# EAGLE board control_panel_rev4 (EAGLE 5.06)
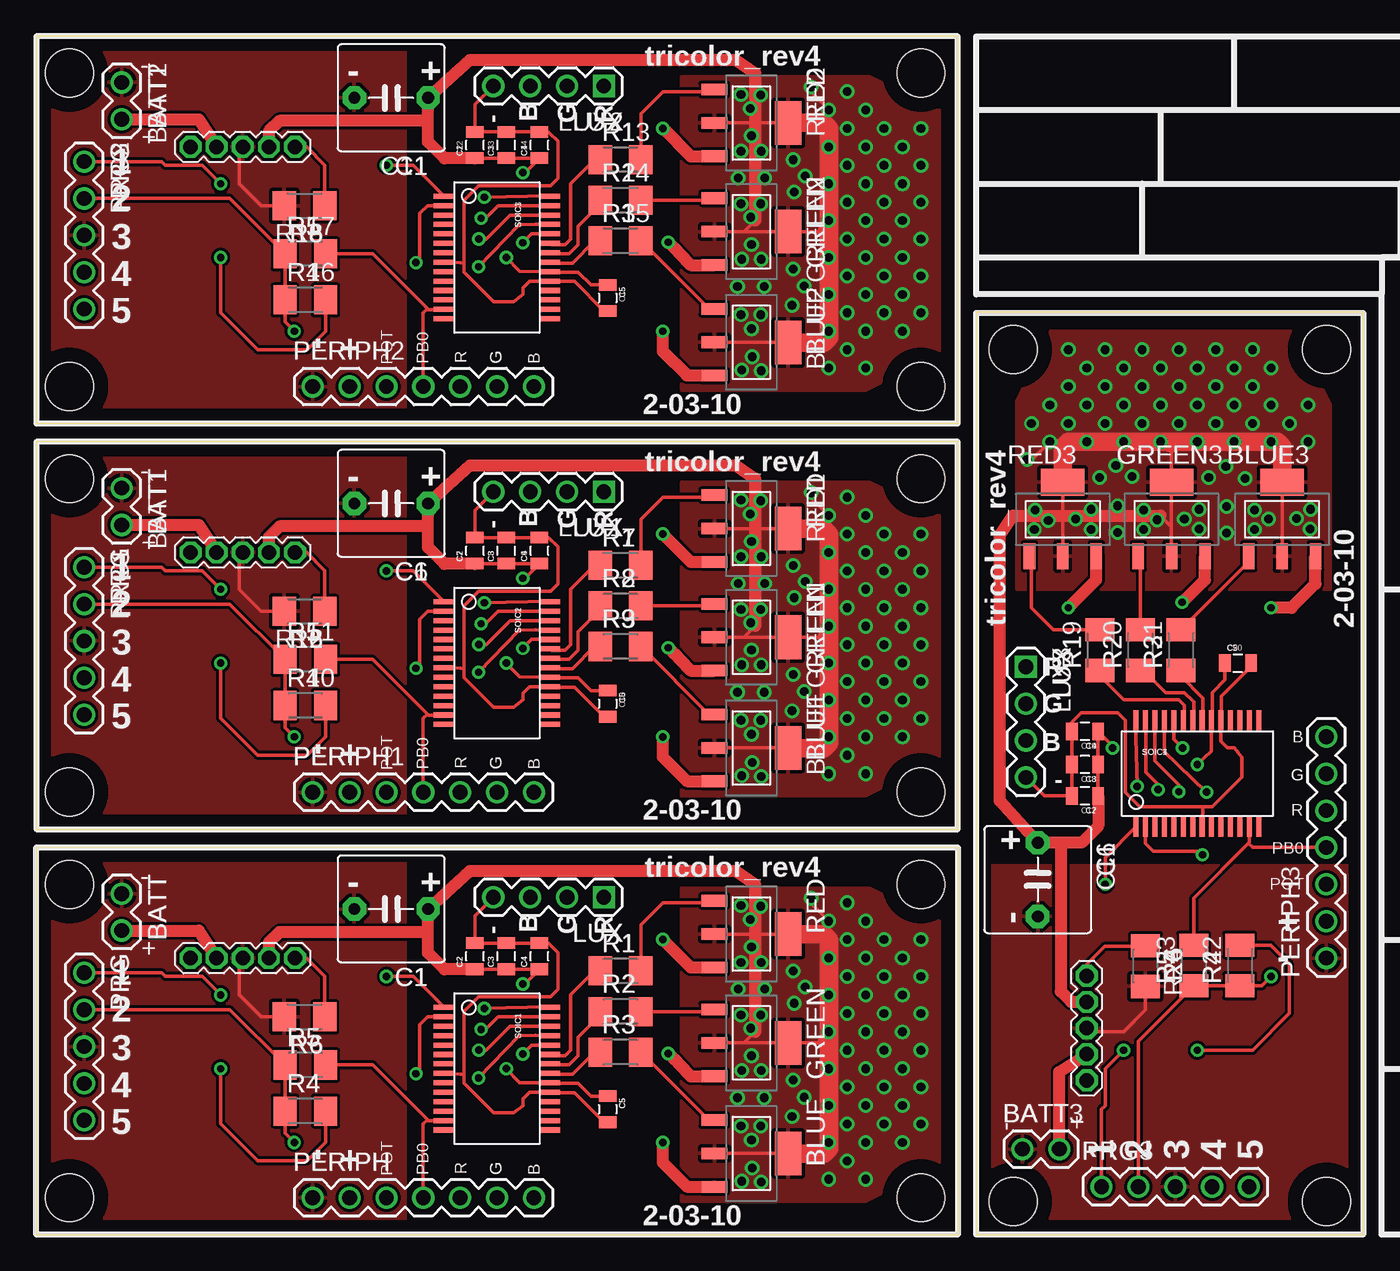
[diagram p0: board, top side]
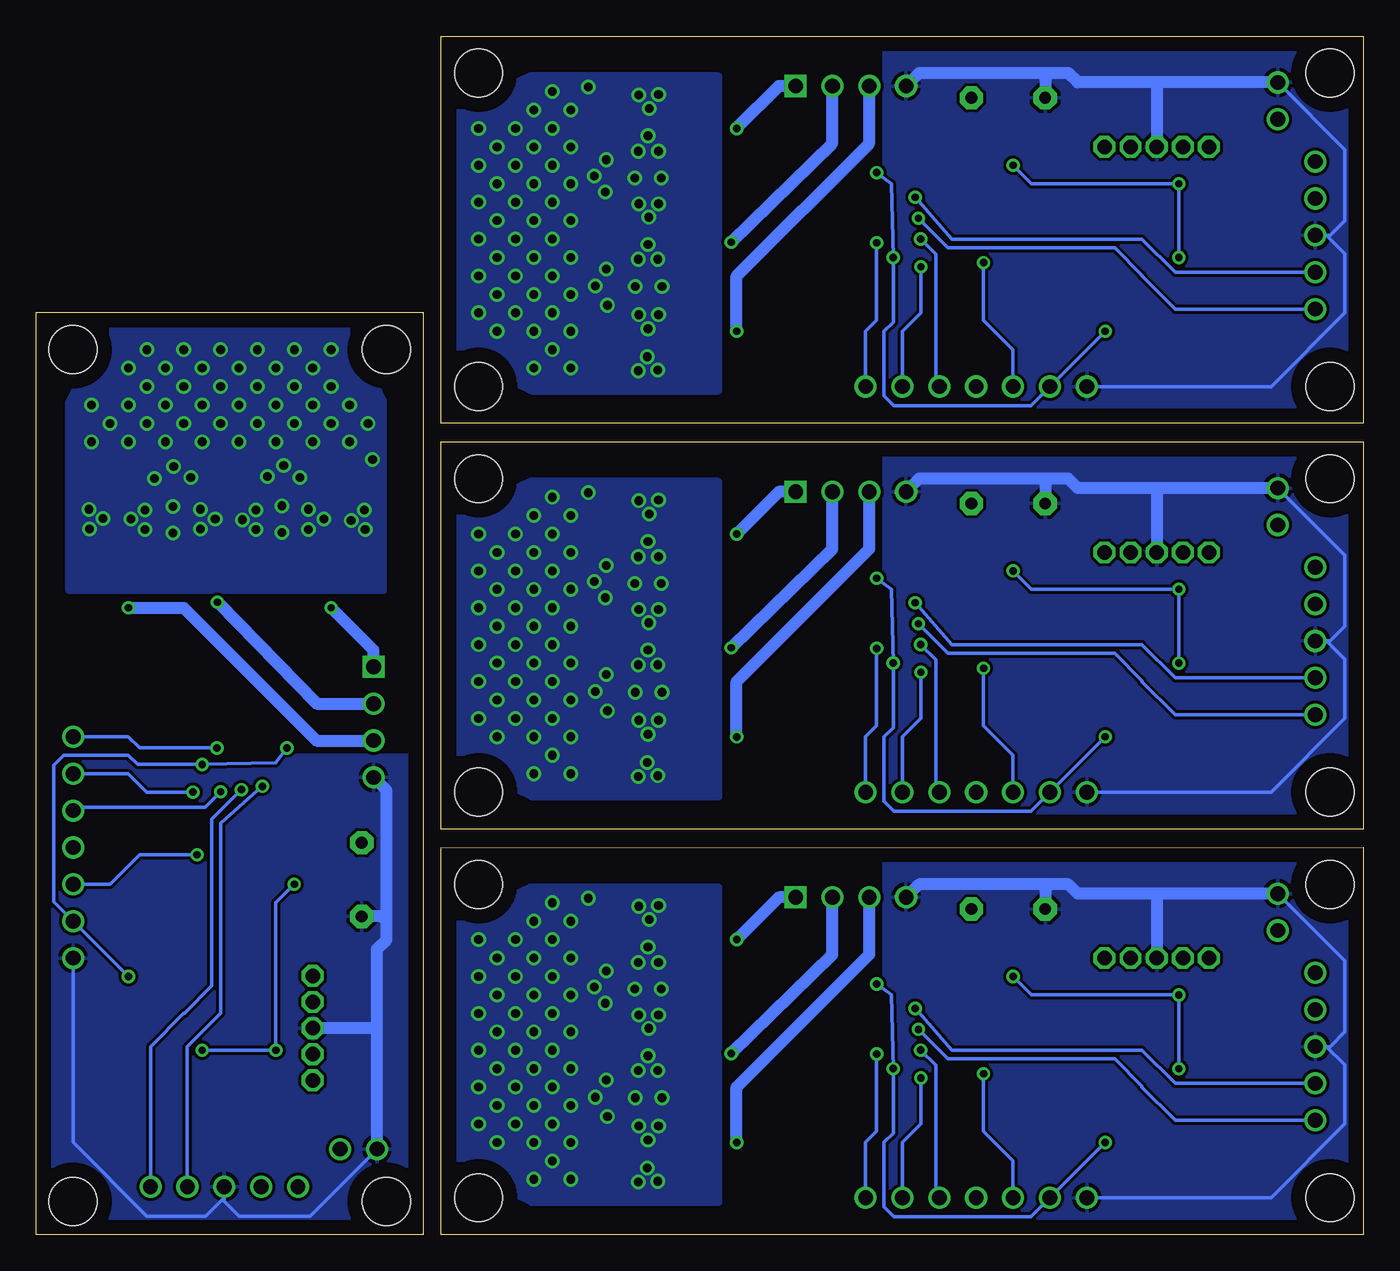
[diagram p1: board, bottom side, seen from below]

Size 91.44 x 82.55 mm. Coordinates in mm from the lower left corner, seen from the top.
Outline: 0,0 63.55,0 63.55,26.66 0,26.67 0,0
Outline: 0,27.94 63.55,27.94 63.55,54.6 0,54.61 0,27.94
Outline: 0,55.88 63.55,55.88 63.55,82.54 0,82.55 0,55.88
Outline: 91.44,0 91.44,63.55 64.78,63.55 64.77,0 91.44,0
Copper layers (1*16): Top 0.035mm / dielectric 1.5mm / Bottom 0.035mm
Design rules "default": minimum track width 10mil, minimum drill 24mil, track to track 8mil, track to pad 8mil, pad to pad 8mil, via to via 8mil, smd to smd 8mil, copper to edge 40mil, drill to drill 8mil, minimum pad ring 10mil, minimum via ring 8mil, stop-mask expansion 4mil, vias tented up to drill 0mil, thermal gap 10mil

## Footprints (pad centres in the part's own frame; a part is rotated, then mirrored left to right if it is on the bottom)
1X02 = drill 1.016 round: 1 0,0; 2 2.54,0
SOT223 = smd 0.8 x 1.8: BASE -2.3,-2.55; COLL 0,-2.54; EMIT 2.3,-2.55 | smd 3 x 1.85: HEAT 0,2.54
C5B7.2 = drill 0.813 pad 1.6 octagon: 1 -2.54,0; 2 2.54,0
0805 = smd 0.8 x 1.2: 1 -0.9,0; 2 0.9,0
1X04 = drill 1.016 square: 1 0,0 | drill 1.016 round: 2 2.54,0; 3 5.08,0; 4 7.62,0
HEADER2MM_5 = drill 1 octagon: P$6 0,0; P$7 1.8,0; P$8 3.6,0; P$9 5.4,0; P$10 7.2,0
1X07 = drill 1.016 round: 1 0,0; 2 2.54,0; 3 5.08,0; 4 7.62,0; 5 10.16,0; 6 12.7,0; 7 15.24,0
1X05 = drill 1.016 round: 1 0,0; 2 2.54,0; 3 5.08,0; 4 7.62,0; 5 10.16,0
M1206 = smd 1.6 x 2: 1 -1.4,0; 2 1.4,0
SSOP-28 = smd 0.348 x 1.397: 1 -4.225,-3.656; 2 -3.575,-3.656; 3 -2.925,-3.656; 4 -2.275,-3.656; 5 -1.625,-3.656; 6 -0.975,-3.656; 7 -0.325,-3.656; 8 0.325,-3.656; 9 0.975,-3.656; 10 1.625,-3.656; 11 2.275,-3.656; 12 2.925,-3.656; 13 3.575,-3.656; 14 4.225,-3.656; 15 4.225,3.656; 16 3.575,3.656; 17 2.925,3.656; 18 2.275,3.656; 19 1.625,3.656; 20 0.975,3.656; 21 0.325,3.656; 22 -0.325,3.656; 23 -0.975,3.656; 24 -1.625,3.656; 25 -2.275,3.656; 26 -2.925,3.656; 27 -3.575,3.656; 28 -4.225,3.656
STAND-OFF = hole 3.302: 0,0

## Placement (x,y rotation side)
BATT  [1X02]  5.89,23.49 270 top
BATT1  [1X02]  5.89,51.43 270 top
BATT2  [1X02]  5.89,79.37 270 top
BATT3  [1X02]  67.95,5.89 0 top
BLUE  FZTA14V1  [SOT223]  49.28,5.59 270 top
BLUE1  FZTA14V1  [SOT223]  49.28,33.53 270 top
BLUE2  FZTA14V1  [SOT223]  49.28,61.47 270 top
BLUE3  FZTA14V1  [SOT223]  85.85,49.28 0 top
C1  100uf  [C5B7.2]  24.46,22.43 180 top
C2  .01uF  [0805]  30.23,19.18 90 top
C3  .1uF  [0805]  32.38,19.18 90 top
C4  .1uF  [0805]  34.67,19.18 90 top
C5  .01uF  [0805]  39.37,8.64 270 top
C6  100uf  [C5B7.2]  24.46,50.37 180 top
C7  .01uF  [0805]  30.23,47.12 90 top
C8  .1uF  [0805]  32.38,47.12 90 top
C9  .1uF  [0805]  34.67,47.12 90 top
C10  .01uF  [0805]  39.37,36.58 270 top
C11  100uf  [C5B7.2]  24.46,78.31 180 top
C12  .01uF  [0805]  30.23,75.06 90 top
C13  .1uF  [0805]  32.38,75.06 90 top
C14  .1uF  [0805]  34.67,75.06 90 top
C15  .01uF  [0805]  39.37,64.52 270 top
C16  100uf  [C5B7.2]  69.01,24.46 270 top
C17  .01uF  [0805]  72.26,30.23 180 top
C18  .1uF  [0805]  72.26,32.39 180 top
C19  .1uF  [0805]  72.26,34.67 180 top
C20  .01uF  [0805]  82.8,39.37 0 top
GREEN  FZTA14V1  [SOT223]  49.28,13.21 270 top
GREEN1  FZTA14V1  [SOT223]  49.28,41.15 270 top
GREEN2  FZTA14V1  [SOT223]  49.28,69.09 270 top
GREEN3  FZTA14V1  [SOT223]  78.23,49.28 0 top
LUX  [1X04]  39.12,23.24 180 top
LUX1  [1X04]  39.12,51.18 180 top
LUX2  [1X04]  39.12,79.12 180 top
LUX3  [1X04]  68.2,39.12 270 top
OKR-T/3-W1  HEADER_2MM  [HEADER2MM_5]  17.83,46.99 180 top
OKR-T/3-W2  HEADER_2MM  [HEADER2MM_5]  17.83,74.93 180 top
OKR-T/3-W3  HEADER_2MM  [HEADER2MM_5]  72.39,17.83 270 top
OKR-T/3-W12  HEADER_2MM  [HEADER2MM_5]  17.83,19.05 180 top
PERIPH  [1X07]  19.05,2.54 0 top
PERIPH1  [1X07]  19.05,30.48 0 top
PERIPH2  [1X07]  19.05,58.42 0 top
PERIPH3  [1X07]  88.9,19.05 90 top
PRG  [1X05]  3.3,18.04 270 top
PRG1  [1X05]  3.3,45.97 270 top
PRG2  [1X05]  3.3,73.92 270 top
PRG3  [1X05]  73.41,3.3 0 top
R1  6.65K  [M1206]  40.26,18.16 0 top
R2  3.3K  [M1206]  40.26,15.37 0 top
R3  3.3K  [M1206]  40.26,12.57 0 top
R4  10K  [M1206]  18.54,8.51 0 top
R5  10K  [M1206]  18.54,11.68 0 top
R6  250  [M1206]  18.49,15 180 top
R7  6.65K  [M1206]  40.26,46.1 0 top
R8  3.3K  [M1206]  40.26,43.31 0 top
R9  3.3K  [M1206]  40.26,40.51 0 top
R10  10K  [M1206]  18.54,36.45 0 top
R11  10K  [M1206]  18.54,39.62 0 top
R12  250  [M1206]  18.49,42.94 180 top
R13  6.65K  [M1206]  40.26,74.04 0 top
R14  3.3K  [M1206]  40.26,71.25 0 top
R15  3.3K  [M1206]  40.26,68.45 0 top
R16  10K  [M1206]  18.54,64.39 0 top
R17  10K  [M1206]  18.54,67.56 0 top
R18  250  [M1206]  18.49,70.88 180 top
R19  6.65K  [M1206]  73.28,40.26 90 top
R20  3.3K  [M1206]  76.07,40.26 90 top
R21  3.3K  [M1206]  78.87,40.26 90 top
R22  10K  [M1206]  82.93,18.54 90 top
R23  10K  [M1206]  79.76,18.54 90 top
R24  250  [M1206]  76.44,18.5 270 top
RED  FZTA14V1  [SOT223]  49.28,20.7 270 top
RED1  FZTA14V1  [SOT223]  49.28,48.64 270 top
RED2  FZTA14V1  [SOT223]  49.28,76.58 270 top
RED3  FZTA14V1  [SOT223]  70.74,49.28 0 top
SOIC1  P18F2221SSOP  [SSOP-28]  31.75,11.43 270 top
SOIC2  P18F2221SSOP  [SSOP-28]  31.75,39.37 270 top
SOIC3  P18F2221SSOP  [SSOP-28]  31.75,67.31 270 top
SOIC4  P18F2221SSOP  [SSOP-28]  80.01,31.75 0 top
U$1  [STAND-OFF]  2.29,2.54 0 top
U$2  [STAND-OFF]  2.29,24.13 0 top
U$3  [STAND-OFF]  60.96,24.13 0 top
U$4  [STAND-OFF]  60.96,2.54 0 top
U$5  [STAND-OFF]  2.29,30.48 0 top
U$6  [STAND-OFF]  2.29,52.07 0 top
U$7  [STAND-OFF]  60.96,52.07 0 top
U$8  [STAND-OFF]  60.96,30.48 0 top
U$9  [STAND-OFF]  2.29,58.42 0 top
U$10  [STAND-OFF]  2.29,80.01 0 top
U$11  [STAND-OFF]  60.96,80.01 0 top
U$12  [STAND-OFF]  60.96,58.42 0 top
U$13  [STAND-OFF]  88.9,2.29 90 top
U$14  [STAND-OFF]  67.31,2.29 90 top
U$15  [STAND-OFF]  67.31,60.96 90 top
U$16  [STAND-OFF]  88.9,60.96 90 top

## Library data of the parts
BATT BATT1-BATT3 C2-C5 C7-C10 C12-C15 C17-C20 LUX LUX1-LUX3 PERIPH PERIPH1-PERIPH3 PRG PRG1-PRG3 U$1-U$16 = SparkFun
BLUE BLUE1-BLUE3 GREEN GREEN1-GREEN3 RED RED1-RED3 SOIC1-SOIC4 = purduecer
C1 C6 C11 C16 = capacitor-wima
OKR-T/3-W1-OKR-T/3-W3 OKR-T/3-W12 = NBitWonder
R1-R24 = resistor

## Nets
BLUE_IND: PERIPH.7 SOIC1.24
BLUE_IND1: PERIPH1.7 SOIC2.24
BLUE_IND2: PERIPH2.7 SOIC3.24
BLUE_IND3: PERIPH3.7 SOIC4.24
BLUE_LUX: BLUE.EMIT LUX.3
BLUE_LUX1: BLUE1.EMIT LUX1.3
BLUE_LUX2: BLUE2.EMIT LUX2.3
BLUE_LUX3: BLUE3.EMIT LUX3.3
GND: BATT.1 C1.2 C2.2 C3.2 C4.2 C5.2 LUX.4 OKR-T/3-W12.P$8 PERIPH.1 PRG.3 R6.2 SOIC1.8 SOIC1.19
GND1: BATT1.1 C6.2 C7.2 C8.2 C9.2 C10.2 LUX1.4 OKR-T/3-W1.P$8 PERIPH1.1 PRG1.3 R12.2 SOIC2.8 SOIC2.19
GND2: BATT2.1 C11.2 C12.2 C13.2 C14.2 C15.2 LUX2.4 OKR-T/3-W2.P$8 PERIPH2.1 PRG2.3 R18.2 SOIC3.8 SOIC3.19
GND3: BATT3.1 C16.2 C17.2 C18.2 C19.2 C20.2 LUX3.4 OKR-T/3-W3.P$8 PERIPH3.1 PRG3.3 R24.2 SOIC4.8 SOIC4.19
GREEN_IND: PERIPH.6 SOIC1.25
GREEN_IND1: PERIPH1.6 SOIC2.25
GREEN_IND2: PERIPH2.6 SOIC3.25
GREEN_IND3: PERIPH3.6 SOIC4.25
GREEN_LUX: GREEN.EMIT LUX.2
GREEN_LUX1: GREEN1.EMIT LUX1.2
GREEN_LUX2: GREEN2.EMIT LUX2.2
GREEN_LUX3: GREEN3.EMIT LUX3.2
MCLR: PRG.1 R4.2 SOIC1.1
MCLR1: PRG1.1 R10.2 SOIC2.1
MCLR2: PRG2.1 R16.2 SOIC3.1
MCLR3: PRG3.1 R22.2 SOIC4.1
N$1: R7.1 SOIC2.23
N$2: R7.2 RED1.BASE
N$3: R8.1 SOIC2.22
N$4: R1.1 SOIC1.23
N$5: R1.2 RED.BASE
N$6: R2.1 SOIC1.22
N$7: GREEN.BASE R2.2
N$8: R3.1 SOIC1.21
N$9: BLUE.BASE R3.2
N$10: GREEN1.BASE R8.2
N$11: R9.1 SOIC2.21
N$12: BLUE1.BASE R9.2
N$13: OKR-T/3-W1.P$6 R12.1
N$14: R13.1 SOIC3.23
N$15: R13.2 RED2.BASE
N$16: R14.1 SOIC3.22
N$17: GREEN2.BASE R14.2
N$18: R15.1 SOIC3.21
N$19: OKR-T/3-W12.P$6 R6.1
N$20: BLUE2.BASE R15.2
N$21: OKR-T/3-W2.P$6 R18.1
N$22: R19.1 SOIC4.23
N$23: R19.2 RED3.BASE
N$24: R20.1 SOIC4.22
N$25: GREEN3.BASE R20.2
N$26: R21.1 SOIC4.21
N$27: BLUE3.BASE R21.2
N$28: OKR-T/3-W3.P$6 R24.1
PB0: PERIPH.4 R5.2 SOIC1.13
PB1: PERIPH1.4 R11.2 SOIC2.13
PB2: PERIPH2.4 R17.2 SOIC3.13
PB3: PERIPH3.4 R23.2 SOIC4.13
PGC: PRG.5 SOIC1.27
PGC1: PRG1.5 SOIC2.27
PGC2: PRG2.5 SOIC3.27
PGC3: PRG3.5 SOIC4.27
PGD: PRG.4 SOIC1.28
PGD1: PRG1.4 SOIC2.28
PGD2: PRG2.4 SOIC3.28
PGD3: PRG3.4 SOIC4.28
POT: PERIPH.3 SOIC1.2
POT1: PERIPH1.3 SOIC2.2
POT2: PERIPH2.3 SOIC3.2
POT3: PERIPH3.3 SOIC4.2
PWR: BATT.2 OKR-T/3-W12.P$9
PWR1: BATT1.2 OKR-T/3-W1.P$9
PWR2: BATT2.2 OKR-T/3-W2.P$9
PWR3: BATT3.2 OKR-T/3-W3.P$9
RED_IND: PERIPH.5 SOIC1.26
RED_IND1: PERIPH1.5 SOIC2.26
RED_IND2: PERIPH2.5 SOIC3.26
RED_IND3: PERIPH3.5 SOIC4.26
RED_LUX: LUX.1 RED.EMIT
RED_LUX1: LUX1.1 RED1.EMIT
RED_LUX2: LUX2.1 RED2.EMIT
RED_LUX3: LUX3.1 RED3.EMIT
VCC: BLUE.COLL BLUE.HEAT C1.1 C2.1 C3.1 C4.1 C5.1 GREEN.COLL GREEN.HEAT OKR-T/3-W12.P$7 PERIPH.2 PRG.2 R4.1 R5.1 RED.COLL RED.HEAT SOIC1.20
VCC1: BLUE1.COLL BLUE1.HEAT C6.1 C7.1 C8.1 C9.1 C10.1 GREEN1.COLL GREEN1.HEAT OKR-T/3-W1.P$7 PERIPH1.2 PRG1.2 R10.1 R11.1 RED1.COLL RED1.HEAT SOIC2.20
VCC2: BLUE2.COLL BLUE2.HEAT C11.1 C12.1 C13.1 C14.1 C15.1 GREEN2.COLL GREEN2.HEAT OKR-T/3-W2.P$7 PERIPH2.2 PRG2.2 R16.1 R17.1 RED2.COLL RED2.HEAT SOIC3.20
VCC3: BLUE3.COLL BLUE3.HEAT C16.1 C17.1 C18.1 C19.1 C20.1 GREEN3.COLL GREEN3.HEAT OKR-T/3-W3.P$7 PERIPH3.2 PRG3.2 R22.1 R23.1 RED3.COLL RED3.HEAT SOIC4.20

## Tracks (layer width: path | path; a pad name or v marks a point on that pad's centre or on a via)
BLUE_IND  (via drill 0.51)
  Top 0.254: SOIC1.24 34.14,13.06 v33.53,12.45
  Bottom 0.254: v33.53,12.45 33.53,7.11 34.29,6.35 PERIPH.7
BLUE_IND1  (via drill 0.51)
  Top 0.254: SOIC2.24 34.14,41 v33.53,40.39
  Bottom 0.254: v33.53,40.39 33.53,35.05 34.29,34.29 PERIPH1.7
BLUE_IND2  (via drill 0.51)
  Top 0.254: SOIC3.24 34.14,68.94 v33.53,68.33
  Bottom 0.254: v33.53,68.33 33.53,62.99 34.29,62.23 PERIPH2.7
BLUE_IND3  (via drill 0.51)
  Top 0.254: SOIC4.24 78.39,34.14 v78.99,33.53
  Bottom 0.254: v78.99,33.53 84.33,33.53 85.09,34.29 PERIPH3.7
BLUE_LUX  (via drill 0.51)
  Top 0.813: v43.18,6.35 43.18,4.95 44.83,3.3 46.71,3.3 BLUE.EMIT
  Bottom 0.813: LUX.3 34.04,19.3 43.18,10.16 v43.18,6.35
BLUE_LUX1  (via drill 0.51)
  Top 0.813: v43.18,34.29 43.18,32.89 44.83,31.24 46.71,31.24 BLUE1.EMIT
  Bottom 0.813: LUX1.3 34.04,47.24 43.18,38.1 v43.18,34.29
BLUE_LUX2  (via drill 0.51)
  Top 0.813: v43.18,62.23 43.18,60.83 44.83,59.18 46.71,59.18 BLUE2.EMIT
  Bottom 0.813: LUX2.3 34.04,75.19 43.18,66.04 v43.18,62.23
BLUE_LUX3  (via drill 0.51)
  Top 0.813: v85.09,43.18 86.49,43.18 88.14,44.83 88.14,46.71 BLUE3.EMIT
  Bottom 0.813: LUX3.3 72.14,34.04 81.28,43.18 v85.09,43.18
GND
  Top 0.254: LUX.4 30.23,21.97 C2.2 C3.2 C4.2 34.68,20.07 35.31,20.07 35.94,19.43 35.94,16.89 35.43,16.38 31.11,16.38 31.11,16.39 30.47,16.39 29.46,15.38 29.46,12.7 | C5.2 39.13,7.74 37.08,9.78 35.43,9.78 SOIC1.19 33.98,9.81 33.53,9.36 33.53,8.89 32.89,8.38 31.5,8.38 29.46,10.41 29.46,11.05 | 29.46,11.05 29.25,11.06 SOIC1.8 | 29.46,12.7 29.46,11.05 | 29.46,12.7 29.46,12.96 | R6.2 15.48,15 13.97,16.51 13.97,18.91 OKR-T/3-W12.P$8
  Bottom 0.254: 2.54,12.96 2.29,12.96 1.27,13.97 1.27,18.87 BATT.1 | 2.54,12.96 PRG.3 | PERIPH.1 6.35,2.54 1.27,7.62 1.27,11.68 2.54,12.96
  Bottom 0.813: BATT.1 13.97,23.49 | 13.97,23.49 19.68,23.49 20.32,24.13 21.59,24.13 | 21.59,24.13 30.61,24.13 LUX.4 | C1.2 21.92,23.8 21.59,24.13 | OKR-T/3-W12.P$8 14.23,23.23 13.97,23.49
  pour Bottom: 33.02,0 33.02,26.67 0,26.67 0,0
  pour Top: 25.4,0 25.4,26.67 0,26.67 0,0
GND1
  Top 0.254: LUX1.4 30.23,49.91 C7.2 C8.2 C9.2 34.68,48.01 35.31,48.01 35.94,47.37 35.94,44.83 35.43,44.32 31.11,44.32 30.47,44.32 29.46,43.32 29.46,40.64 | C10.2 39.13,35.68 37.08,37.72 35.43,37.72 SOIC2.19 33.98,37.75 33.53,37.3 33.53,36.83 32.89,36.32 31.5,36.32 29.46,38.35 29.46,38.99 | 29.46,38.99 29.25,39 SOIC2.8 | 29.46,40.64 29.46,38.99 | 29.46,40.64 29.46,40.89 | R12.2 15.48,42.94 13.97,44.45 13.97,46.85 OKR-T/3-W1.P$8
  Bottom 0.254: 2.54,40.89 2.29,40.89 1.27,41.91 1.27,46.81 BATT1.1 | 2.54,40.89 PRG1.3 | PERIPH1.1 6.35,30.48 1.27,35.56 1.27,39.62 2.54,40.89
  Bottom 0.813: BATT1.1 13.97,51.43 | 13.97,51.43 19.68,51.43 20.32,52.07 21.59,52.07 | 21.59,52.07 30.61,52.07 LUX1.4 | C6.2 21.92,51.74 21.59,52.07 | OKR-T/3-W1.P$8 14.23,51.17 13.97,51.43
  pour Bottom: 33.02,27.94 33.02,54.61 0,54.61 0,27.94
  pour Top: 25.4,27.94 25.4,54.61 0,54.61 0,27.94
GND2
  Top 0.254: LUX2.4 30.23,77.85 C12.2 C13.2 C14.2 34.68,75.95 35.31,75.95 35.94,75.31 35.94,72.77 35.43,72.26 31.11,72.26 31.11,72.27 30.47,72.27 29.46,71.26 29.46,68.58 | C15.2 39.13,63.62 37.08,65.66 35.43,65.66 SOIC3.19 33.98,65.69 33.53,65.24 33.53,64.77 32.89,64.26 31.5,64.26 29.46,66.3 29.46,66.93 | 29.46,66.93 29.25,66.94 SOIC3.8 | 29.46,68.58 29.46,66.93 | 29.46,68.58 29.46,68.84 | R18.2 15.48,70.88 13.97,72.39 13.97,74.79 OKR-T/3-W2.P$8
  Bottom 0.254: 2.54,68.84 2.29,68.84 1.27,69.85 1.27,74.75 BATT2.1 | 2.54,68.84 PRG2.3 | PERIPH2.1 6.35,58.42 1.27,63.5 1.27,67.56 2.54,68.84
  Bottom 0.813: BATT2.1 13.97,79.37 | 13.97,79.37 19.68,79.37 20.32,80.01 21.59,80.01 | 21.59,80.01 30.61,80.01 LUX2.4 | C11.2 21.92,79.68 21.59,80.01 | OKR-T/3-W2.P$8 14.23,79.11 13.97,79.37
  pour Bottom: 33.02,55.88 33.02,82.55 0,82.55 0,55.88
  pour Top: 25.4,55.88 25.4,82.55 0,82.55 0,55.88
GND3
  Top 0.254: LUX3.4 69.47,30.23 C17.2 C18.2 C19.2 71.37,34.68 71.37,35.31 72.01,35.94 74.55,35.94 75.06,35.43 75.06,31.12 75.06,30.47 76.06,29.46 78.74,29.46 | C20.2 83.7,39.13 81.66,37.09 81.66,35.43 SOIC4.19 81.63,33.98 82.08,33.53 82.55,33.53 83.06,32.89 83.06,31.5 81.03,29.46 80.39,29.46 | 80.39,29.46 80.38,29.25 SOIC4.8 | 78.74,29.46 80.39,29.46 | 78.74,29.46 78.49,29.46 | R24.2 76.44,15.48 74.93,13.97 72.53,13.97 OKR-T/3-W3.P$8
  Bottom 0.254: 78.49,2.54 78.49,2.29 77.47,1.27 72.57,1.27 BATT3.1 | 78.49,2.54 PRG3.3 | PERIPH3.1 88.9,6.35 83.82,1.27 79.76,1.27 78.49,2.54
  Bottom 0.813: BATT3.1 67.95,13.97 | 67.95,13.97 67.95,19.68 67.31,20.32 67.31,21.59 | 67.31,21.59 67.31,30.61 LUX3.4 | C16.2 67.64,21.92 67.31,21.59 | OKR-T/3-W3.P$8 68.21,14.23 67.95,13.97
  pour Bottom: 91.44,33.02 64.77,33.02 64.77,0 91.44,0
  pour Top: 91.44,25.4 64.77,25.4 64.77,0 91.44,0
GREEN_IND  (via drill 0.51)
  Top 0.254: v30.48,10.8 33.26,13.7 34.42,13.72 SOIC1.25
  Bottom 0.254: v30.48,10.8 30.48,7.62 31.75,6.35 PERIPH.6
GREEN_IND1  (via drill 0.51)
  Top 0.254: v30.48,38.74 33.26,41.64 34.42,41.66 SOIC2.25
  Bottom 0.254: v30.48,38.74 30.48,35.56 31.75,34.29 PERIPH1.6
GREEN_IND2  (via drill 0.51)
  Top 0.254: v30.48,66.68 33.26,69.58 34.42,69.6 SOIC3.25
  Bottom 0.254: v30.48,66.68 30.48,63.5 31.75,62.23 PERIPH2.6
GREEN_IND3  (via drill 0.51)
  Top 0.254: v80.64,30.48 77.74,33.26 77.72,34.42 SOIC4.25
  Bottom 0.254: v80.64,30.48 83.82,30.48 85.09,31.75 PERIPH3.6
GREEN_LUX  (via drill 0.51)
  Top 0.813: v43.56,12.48 43.94,12.1 44.96,11.05 45.1,10.91 GREEN.EMIT
  Bottom 0.813: LUX.2 36.58,19.3 v43.56,12.48
GREEN_LUX1  (via drill 0.51)
  Top 0.813: v43.56,40.42 43.94,40.04 44.96,38.99 45.1,38.85 GREEN1.EMIT
  Bottom 0.813: LUX1.2 36.58,47.24 v43.56,40.42
GREEN_LUX2  (via drill 0.51)
  Top 0.813: v43.56,68.36 43.94,67.98 44.96,66.93 45.1,66.79 GREEN2.EMIT
  Bottom 0.813: LUX2.2 36.58,75.19 v43.56,68.36
GREEN_LUX3  (via drill 0.51)
  Top 0.813: v78.96,43.56 79.34,43.94 80.39,44.96 80.53,45.1 GREEN3.EMIT
  Bottom 0.813: LUX3.2 72.14,36.58 v78.96,43.56
MCLR  (via drill 0.5)
  Top 0.254: 28.08,15.66 27.94,15.66 27.95,15.66 SOIC1.1 25.97,17.78 v24.13,17.78 | PRG.1 8.64,18.04 8.89,17.78 11.43,17.78 v12.7,16.51 | v12.7,11.43 12.7,7.62 15.24,5.08 18.66,5.08 19.94,6.36 R4.2
  Bottom 0.254: v24.13,17.78 22.86,16.51 v12.7,16.51 v12.7,11.43
MCLR1  (via drill 0.5)
  Top 0.254: 28.08,43.6 27.94,43.6 27.95,43.6 SOIC2.1 25.97,45.72 v24.13,45.72 | PRG1.1 8.64,45.97 8.89,45.72 11.43,45.72 v12.7,44.45 | v12.7,39.37 12.7,35.56 15.24,33.02 18.66,33.02 19.94,34.3 R10.2
  Bottom 0.254: v24.13,45.72 22.86,44.45 v12.7,44.45 v12.7,39.37
MCLR2  (via drill 0.5)
  Top 0.254: 28.08,71.55 27.94,71.54 27.95,71.54 SOIC3.1 25.97,73.66 v24.13,73.66 | PRG2.1 8.64,73.92 8.89,73.66 11.43,73.66 v12.7,72.39 | v12.7,67.31 12.7,63.5 15.24,60.96 18.66,60.96 19.94,62.24 R16.2
  Bottom 0.254: v24.13,73.66 22.86,72.39 v12.7,72.39 v12.7,67.31
MCLR3  (via drill 0.5)
  Top 0.254: 75.78,28.08 75.78,27.94 75.78,27.95 SOIC4.1 73.66,25.97 v73.66,24.13 | PRG3.1 73.41,8.64 73.66,8.89 73.66,11.43 v74.93,12.7 | v80.01,12.7 83.82,12.7 86.36,15.24 86.36,18.66 85.08,19.94 R22.2
  Bottom 0.254: v73.66,24.13 74.93,22.86 v74.93,12.7 v80.01,12.7
N$1
  Top 0.254: R7.1 38.48,46.1 36.83,44.45 36.83,40.64 36.45,40.26 35.49,40.26 SOIC2.23
N$2
  Top 0.254: R7.2 41.66,49.28 43.18,50.8 46.59,50.8 RED1.BASE
N$3
  Top 0.254: R8.1 38.86,43.05 37.34,41.53 37.34,40.26 36.7,39.62 35.48,39.62 SOIC2.22
N$4
  Top 0.254: R1.1 38.48,18.16 36.83,16.51 36.83,12.7 36.45,12.32 35.49,12.32 SOIC1.23
N$5
  Top 0.254: R1.2 41.66,21.34 43.18,22.86 46.59,22.86 RED.BASE
N$6
  Top 0.254: R2.1 38.86,15.11 37.34,13.59 37.34,12.32 36.7,11.68 35.48,11.68 SOIC1.22
N$7
  Top 0.254: R2.2 46.59,15.37 GREEN.BASE
N$8
  Top 0.254: R3.1 38.48,12.57 36.96,11.05 35.46,11.05 SOIC1.21
N$9
  Top 0.254: BLUE.BASE 46.34,7.89 R3.2
N$10
  Top 0.254: R8.2 46.59,43.31 GREEN1.BASE
N$11
  Top 0.254: R9.1 38.48,40.51 36.96,38.99 35.46,38.99 SOIC2.21
N$12
  Top 0.254: BLUE1.BASE 46.34,35.83 R9.2
N$13
  Top 0.254: OKR-T/3-W1.P$6 18.62,46.99 19.88,45.73 19.88,42.96 R12.1
N$14
  Top 0.254: R13.1 38.48,74.04 36.83,72.39 36.83,68.58 36.45,68.2 35.49,68.2 SOIC3.23
N$15
  Top 0.254: R13.2 41.66,77.22 43.18,78.74 46.59,78.74 RED2.BASE
N$16
  Top 0.254: R14.1 38.86,70.99 37.34,69.47 37.34,68.2 36.7,67.56 35.48,67.56 SOIC3.22
N$17
  Top 0.254: R14.2 46.59,71.25 GREEN2.BASE
N$18
  Top 0.254: R15.1 38.48,68.45 36.96,66.93 35.46,66.93 SOIC3.21
N$19
  Top 0.254: OKR-T/3-W12.P$6 18.62,19.05 19.88,17.79 19.88,15.02 R6.1
N$20
  Top 0.254: BLUE2.BASE 46.34,63.77 R15.2
N$21
  Top 0.254: OKR-T/3-W2.P$6 18.62,74.93 19.88,73.67 19.88,70.9 R18.1
N$22
  Top 0.254: R19.1 73.28,38.48 74.93,36.83 78.74,36.83 79.12,36.45 79.12,35.49 SOIC4.23
N$23
  Top 0.254: R19.2 70.1,41.66 68.58,43.18 68.58,46.59 RED3.BASE
N$24
  Top 0.254: R20.1 76.33,38.86 77.85,37.34 79.12,37.34 79.76,36.7 79.76,35.48 SOIC4.22
N$25
  Top 0.254: R20.2 76.07,46.59 GREEN3.BASE
N$26
  Top 0.254: R21.1 78.87,38.48 80.39,36.96 80.39,35.46 SOIC4.21
N$27
  Top 0.254: BLUE3.BASE 83.55,46.34 R21.2
N$28
  Top 0.254: OKR-T/3-W3.P$6 72.39,18.62 73.65,19.88 76.42,19.88 R24.1
PB0
  Top 0.254: R5.2 23.18,11.68 26.95,7.91 | 26.95,7.91 27.03,7.83 28.07,7.83 SOIC1.13 | PERIPH.4 26.67,7.62 26.95,7.91
PB1
  Top 0.254: R11.2 23.18,39.62 26.95,35.85 | 26.95,35.85 27.03,35.77 28.07,35.77 SOIC2.13 | PERIPH1.4 26.67,35.56 26.95,35.85
PB2
  Top 0.254: R17.2 23.18,67.56 26.95,63.79 | 26.95,63.79 27.03,63.71 28.07,63.71 SOIC3.13 | PERIPH2.4 26.67,63.5 26.95,63.79
PB3
  Top 0.254: R23.2 79.76,23.18 83.53,26.96 | 83.53,26.96 83.61,27.03 83.61,28.07 SOIC4.13 | PERIPH3.4 83.82,26.67 83.53,26.96
PGC  (via drill 0.5)
  Top 0.254: v30.66,14.14 30.98,14.14 31.83,14.99 35.39,14.99 SOIC1.27
  Bottom 0.254: PRG.5 12.95,7.88 15.24,10.16 15.24,10.21 17.13,12.1 28.62,12.1 v30.66,14.14
PGC1  (via drill 0.5)
  Top 0.254: v30.66,42.08 30.98,42.08 31.83,42.93 35.39,42.93 SOIC2.27
  Bottom 0.254: PRG1.5 12.95,35.81 15.24,38.1 15.24,38.15 17.13,40.04 28.62,40.04 v30.66,42.08
PGC2  (via drill 0.5)
  Top 0.254: v30.66,70.02 30.98,70.02 31.83,70.87 35.39,70.87 SOIC3.27
  Bottom 0.254: PRG2.5 12.95,63.75 15.24,66.04 15.24,66.09 17.13,67.98 28.62,67.98 v30.66,70.02
PGC3  (via drill 0.5)
  Top 0.254: v77.31,30.66 77.31,30.98 76.45,31.84 76.45,35.39 SOIC4.27
  Bottom 0.254: PRG3.5 83.57,12.96 81.28,15.24 81.23,15.24 79.34,17.13 79.34,28.62 v77.31,30.66
PGD  (via drill 0.5)
  Top 0.254: v30.87,15.58 35.37,15.69 SOIC1.28
  Bottom 0.254: PRG.4 12.95,10.41 15.24,12.7 28.33,12.7 v30.87,15.58
PGD1  (via drill 0.5)
  Top 0.254: v30.87,43.52 35.37,43.63 SOIC2.28
  Bottom 0.254: PRG1.4 12.95,38.35 15.24,40.64 28.33,40.64 v30.87,43.52
PGD2  (via drill 0.5)
  Top 0.254: v30.87,71.46 35.37,71.57 SOIC3.28
  Bottom 0.254: PRG2.4 12.95,66.3 15.24,68.58 28.33,68.58 v30.87,71.46
PGD3  (via drill 0.5)
  Top 0.254: v75.86,30.88 75.75,35.37 SOIC4.28
  Bottom 0.254: PRG3.4 81.03,12.96 78.74,15.24 78.74,28.33 v75.86,30.88
POT  (via drill 0.5)
  Top 0.254: SOIC1.2 26.95,15.01 26.41,14.46 26.41,11.33 v26.16,11.08
  Bottom 0.254: v26.16,11.08 26.16,7.12 24.13,5.08 PERIPH.3
POT1  (via drill 0.5)
  Top 0.254: SOIC2.2 26.95,42.95 26.41,42.41 26.41,39.27 v26.16,39.02
  Bottom 0.254: v26.16,39.02 26.16,35.05 24.13,33.02 PERIPH1.3
POT2  (via drill 0.5)
  Top 0.254: SOIC3.2 26.95,70.89 26.41,70.34 26.41,67.21 v26.16,66.96
  Bottom 0.254: v26.16,66.96 26.16,62.99 24.13,60.96 PERIPH2.3
POT3  (via drill 0.5)
  Top 0.254: SOIC4.2 76.44,26.95 76.97,26.41 80.11,26.41 v80.36,26.16
  Bottom 0.254: v80.36,26.16 84.33,26.16 86.36,24.13 PERIPH3.3
PWR
  Top 0.813: BATT.2 11.2,20.95 OKR-T/3-W12.P$9
PWR1
  Top 0.813: BATT1.2 11.2,48.89 OKR-T/3-W1.P$9
PWR2
  Top 0.813: BATT2.2 11.2,76.83 OKR-T/3-W2.P$9
PWR3
  Top 0.813: BATT3.2 70.5,11.2 OKR-T/3-W3.P$9
RED_IND  (via drill 0.51)
  Top 0.254: SOIC1.26 32.66,14.36 30.99,12.69 30.52,12.69 v30.5,12.71
  Bottom 0.254: v30.5,12.71 | v30.5,12.71 29.45,11.65 29.45,2.78 PERIPH.5
RED_IND1  (via drill 0.51)
  Top 0.254: SOIC2.26 32.66,42.3 30.99,40.63 30.52,40.63 v30.5,40.65
  Bottom 0.254: v30.5,40.65 29.45,39.59 29.45,30.72 PERIPH1.5
RED_IND2  (via drill 0.51)
  Top 0.254: SOIC3.26 32.66,70.24 30.99,68.57 30.52,68.57 v30.5,68.59
  Bottom 0.254: v30.5,68.59 29.45,67.53 29.45,58.66 PERIPH2.5
RED_IND3  (via drill 0.51)
  Top 0.254: SOIC4.26 77.08,32.66 78.75,31 78.75,30.52 v78.73,30.51
  Bottom 0.254: v78.73,30.51 | v78.73,30.51 79.79,29.45 88.66,29.45 PERIPH3.5
RED_LUX  (via drill 0.51)
  Top 0.813: RED.EMIT 45.1,18.4 v43.18,20.32
  Bottom 0.813: v43.18,20.32 40.27,23.23 39.13,23.23 LUX.1
RED_LUX1  (via drill 0.51)
  Top 0.813: RED1.EMIT 45.1,46.34 v43.18,48.26
  Bottom 0.813: v43.18,48.26 40.27,51.17 39.13,51.17 LUX1.1
RED_LUX2  (via drill 0.51)
  Top 0.813: RED2.EMIT 45.1,74.28 v43.18,76.2
  Bottom 0.813: v43.18,76.2 40.27,79.11 39.13,79.11 LUX2.1
RED_LUX3  (via drill 0.51)
  Top 0.813: RED3.EMIT 73.04,45.1 v71.12,43.18
  Bottom 0.813: v71.12,43.18 68.21,40.27 LUX3.1
VCC  (via drill 0.5, 0.51, 0.6)
  Top 0.254: GREEN.COLL GREEN.HEAT | BLUE.HEAT BLUE.COLL | C5.1 38.22,9.54 37.34,10.41 35.45,10.41 SOIC1.20 33.3,10.47 v32.38,11.43 | RED.HEAT RED.COLL | GREEN.COLL 54.5,13.21 | PRG.2 13.33,15.49 R5.1 R4.1 17.14,6.99 v17.78,6.35 | C2.1 C3.1 C4.1 33.67,17.27 v33.53,17.27 | GREEN.COLL 48.77,13.21 49.53,13.97 | v53.4,23.17 53.4,22.8 v54.61,21.59
  Top 0.813: 49.53,13.97 49.53,24.13 48.17,25.05 29.88,25.05 C1.1 27,20.82 | 27,20.82 27,19.4 28.13,18.27 30.21,18.27 C2.1 | OKR-T/3-W12.P$7 16.03,20.11 16.76,20.84 26.98,20.84 27,20.82
  Top 1.27: RED.HEAT 54.23,20.7 54.61,20.32 v54.61,19.05 v54.61,16.51 v54.61,13.97 54.61,13.32 | 54.61,13.32 v54.61,11.43 v54.61,8.89 v54.61,6.35 54.61,5.91 54.27,5.57 51.83,5.57 BLUE.HEAT | 54.5,13.21 54.61,13.32
  Bottom 0.254: v33.53,17.27 32.51,16.51 v32.38,11.43 32.38,6.99 33.02,6.35 33.02,1.9 32.33,1.22 22.91,1.22 PERIPH.2 v17.78,6.35
  other vias: 54.61,3.81 57.15,3.81 55.88,5.08 57.15,6.35 55.88,7.62 59.69,6.35 58.42,7.62 60.96,7.62 59.69,8.89 57.15,8.89 55.88,10.16 58.42,10.16 60.96,10.16 59.69,11.43 57.15,11.43 55.88,12.7 58.42,12.7 60.96,12.7 59.69,13.97 57.15,13.97 55.88,15.24 58.42,15.24 60.96,15.24 59.69,16.51 57.15,16.51 55.88,17.78 60.96,17.78 58.42,17.78 57.15,19.05 55.88,20.32 59.69,19.05 58.42,20.32 60.96,20.32 57.15,21.59 55.88,22.86 48.61,3.67 49.96,3.63 49.33,4.59 49.29,6.53 48.56,7.49 49.91,7.49 52.08,8.14 52.92,9.46 52.15,10.65 50.15,9.42 48.32,9.42 49.96,11.31 48.61,11.31 49.29,12.32 49.24,14.21 48.56,15.13 49.91,15.13 50.2,16.92 48.37,16.92 52.22,15.93 52.98,17.05 52.15,18.16 49.96,18.75 48.56,18.75 49.29,19.82 49.19,21.7 48.56,22.67 49.91,22.62
  pour Top: 44.45,2.29 44.45,23.88 57.41,23.88 62.23,21.57 62.23,4.83 57.15,2.29
  pour Bottom: 44.45,23.88 57.4,23.88 62.23,21.59 62.23,4.7 57.28,2.29 44.45,2.29
VCC1  (via drill 0.5, 0.51, 0.6)
  Top 0.254: GREEN1.COLL GREEN1.HEAT | BLUE1.HEAT BLUE1.COLL | C10.1 38.22,37.48 37.34,38.35 35.45,38.35 SOIC2.20 33.3,38.41 v32.38,39.37 | RED1.HEAT RED1.COLL | GREEN1.COLL 54.5,41.15 | PRG1.2 13.33,43.43 R11.1 R10.1 17.14,34.93 v17.78,34.29 | C7.1 C8.1 C9.1 33.67,45.21 v33.53,45.21 | GREEN1.COLL 48.77,41.15 49.53,41.91 | v53.4,51.11 53.4,50.74 v54.61,49.53
  Top 0.813: 49.53,41.91 49.53,52.07 48.17,52.99 29.88,52.99 C6.1 27,48.76 | 27,48.76 27,47.34 28.13,46.21 30.21,46.21 C7.1 | OKR-T/3-W1.P$7 16.03,48.05 16.76,48.78 26.98,48.78 27,48.76
  Top 1.27: RED1.HEAT 54.23,48.64 54.61,48.26 v54.61,46.99 v54.61,44.45 v54.61,41.91 54.61,41.26 | 54.61,41.26 v54.61,39.37 v54.61,36.83 v54.61,34.29 54.61,33.85 54.27,33.51 51.83,33.51 BLUE1.HEAT | 54.5,41.15 54.61,41.26
  Bottom 0.254: v33.53,45.21 32.51,44.45 v32.38,39.37 32.38,34.93 33.02,34.29 33.02,29.85 32.33,29.16 22.91,29.16 PERIPH1.2 v17.78,34.29
  other vias: 54.61,31.75 57.15,31.75 55.88,33.02 57.15,34.29 55.88,35.56 59.69,34.29 58.42,35.56 60.96,35.56 59.69,36.83 57.15,36.83 55.88,38.1 58.42,38.1 60.96,38.1 59.69,39.37 57.15,39.37 55.88,40.64 58.42,40.64 60.96,40.64 59.69,41.91 57.15,41.91 55.88,43.18 58.42,43.18 60.96,43.18 59.69,44.45 57.15,44.45 55.88,45.72 60.96,45.72 58.42,45.72 57.15,46.99 55.88,48.26 59.69,46.99 58.42,48.26 60.96,48.26 57.15,49.53 55.88,50.8 48.61,31.61 49.96,31.57 49.33,32.53 49.29,34.47 48.56,35.43 49.91,35.43 52.08,36.08 52.92,37.4 52.15,38.59 50.15,37.36 48.32,37.36 49.96,39.25 48.61,39.25 49.29,40.27 49.24,42.15 48.56,43.07 49.91,43.07 50.2,44.86 48.37,44.86 52.22,43.88 52.98,44.99 52.15,46.1 49.96,46.69 48.56,46.69 49.29,47.76 49.19,49.64 48.56,50.61 49.91,50.56
  pour Top: 44.45,30.23 44.45,51.82 57.41,51.82 62.23,49.51 62.23,32.77 57.15,30.23
  pour Bottom: 44.45,51.82 57.4,51.82 62.23,49.53 62.23,32.64 57.28,30.23 44.45,30.23
VCC2  (via drill 0.5, 0.51, 0.6)
  Top 0.254: GREEN2.COLL GREEN2.HEAT | BLUE2.HEAT BLUE2.COLL | C15.1 38.22,65.42 37.34,66.3 35.45,66.3 SOIC3.20 33.3,66.35 v32.38,67.31 | RED2.HEAT RED2.COLL | GREEN2.COLL 54.5,69.09 | PRG2.2 13.33,71.38 R17.1 R16.1 17.14,62.87 v17.78,62.23 | C12.1 C13.1 C14.1 33.67,73.15 v33.53,73.15 | GREEN2.COLL 48.77,69.09 49.53,69.85 | v53.4,79.05 53.4,78.68 v54.61,77.47
  Top 0.813: 49.53,69.85 49.53,80.01 48.17,80.93 29.88,80.93 C11.1 27,76.7 | 27,76.7 27,75.28 28.13,74.15 30.21,74.15 C12.1 | OKR-T/3-W2.P$7 16.03,75.99 16.76,76.72 26.98,76.72 27,76.7
  Top 1.27: RED2.HEAT 54.23,76.58 54.61,76.2 v54.61,74.93 v54.61,72.39 v54.61,69.85 54.61,69.2 | 54.61,69.2 v54.61,67.31 v54.61,64.77 v54.61,62.23 54.61,61.79 54.27,61.45 51.83,61.45 BLUE2.HEAT | 54.5,69.09 54.61,69.2
  Bottom 0.254: v33.53,73.15 32.51,72.39 v32.38,67.31 32.38,62.87 33.02,62.23 33.02,57.78 32.33,57.1 22.91,57.1 PERIPH2.2 v17.78,62.23
  other vias: 54.61,59.69 57.15,59.69 55.88,60.96 57.15,62.23 55.88,63.5 59.69,62.23 58.42,63.5 60.96,63.5 59.69,64.77 57.15,64.77 55.88,66.04 58.42,66.04 60.96,66.04 59.69,67.31 57.15,67.31 55.88,68.58 58.42,68.58 60.96,68.58 59.69,69.85 57.15,69.85 55.88,71.12 58.42,71.12 60.96,71.12 59.69,72.39 57.15,72.39 55.88,73.66 60.96,73.66 58.42,73.66 57.15,74.93 55.88,76.2 59.69,74.93 58.42,76.2 60.96,76.2 57.15,77.47 55.88,78.74 48.61,59.55 49.96,59.51 49.33,60.47 49.29,62.41 48.56,63.37 49.91,63.37 52.08,64.02 52.92,65.34 52.15,66.53 50.15,65.31 48.32,65.31 49.96,67.19 48.61,67.19 49.29,68.2 49.24,70.09 48.56,71.01 49.91,71.01 50.2,72.8 48.37,72.8 52.22,71.81 52.98,72.93 52.15,74.04 49.96,74.63 48.56,74.63 49.29,75.7 49.19,77.58 48.56,78.55 49.91,78.5
  pour Top: 44.45,58.17 44.45,79.76 57.41,79.76 62.23,77.45 62.23,60.71 57.15,58.17
  pour Bottom: 44.45,79.76 57.4,79.76 62.23,77.47 62.23,60.58 57.28,58.17 44.45,58.17
VCC3  (via drill 0.5, 0.51, 0.6)
  Top 0.254: GREEN3.COLL GREEN3.HEAT | BLUE3.HEAT BLUE3.COLL | C20.1 81.9,38.22 81.03,37.34 81.03,35.45 SOIC4.20 80.97,33.3 v80.01,32.39 | RED3.HEAT RED3.COLL | GREEN3.COLL 78.23,54.5 | PRG3.2 75.95,13.33 R23.1 R22.1 84.45,17.14 v85.09,17.78 | C17.1 C18.1 C19.1 74.17,33.67 v74.17,33.53 | GREEN3.COLL 78.23,48.77 77.47,49.53 | v68.27,53.4 68.64,53.4 v69.85,54.61
  Top 0.813: 77.47,49.53 67.31,49.53 66.39,48.18 66.39,29.89 C16.1 70.62,27 | 70.62,27 72.04,27 73.17,28.13 73.17,30.21 C17.1 | OKR-T/3-W3.P$7 71.33,16.03 70.6,16.76 70.6,26.98 70.62,27
  Top 1.27: RED3.HEAT 70.74,54.23 71.12,54.61 v72.39,54.61 v74.93,54.61 v77.47,54.61 78.12,54.61 | 78.12,54.61 v80.01,54.61 v82.55,54.61 v85.09,54.61 85.53,54.61 85.87,54.27 85.87,51.84 BLUE3.HEAT | 78.23,54.5 78.12,54.61
  Bottom 0.254: v74.17,33.53 74.93,32.51 v80.01,32.39 84.45,32.39 85.09,33.02 89.54,33.02 90.22,32.33 90.22,22.92 PERIPH3.2 v85.09,17.78
  other vias: 87.63,54.61 87.63,57.15 86.36,55.88 85.09,57.15 83.82,55.88 85.09,59.69 83.82,58.42 83.82,60.96 82.55,59.69 82.55,57.15 81.28,55.88 81.28,58.42 81.28,60.96 80.01,59.69 80.01,57.15 78.74,55.88 78.74,58.42 78.74,60.96 77.47,59.69 77.47,57.15 76.2,55.88 76.2,58.42 76.2,60.96 74.93,59.69 74.93,57.15 73.66,55.88 73.66,60.96 73.66,58.42 72.39,57.15 71.12,55.88 72.39,59.69 71.12,58.42 71.12,60.96 69.85,57.15 68.58,55.88 87.77,48.61 87.82,49.96 86.85,49.34 84.92,49.29 83.95,48.56 83.95,49.91 83.3,52.08 81.98,52.92 80.79,52.15 82.02,50.16 82.02,48.32 80.13,49.96 80.13,48.61 79.12,49.29 77.23,49.24 76.31,48.56 76.31,49.91 74.52,50.2 74.52,48.37 75.51,52.22 74.39,52.99 73.28,52.15 72.69,49.96 72.69,48.56 71.62,49.29 69.74,49.19 68.77,48.56 68.82,49.91
  pour Top: 89.15,44.45 67.56,44.45 67.56,57.42 69.87,62.23 86.61,62.23 89.15,57.15
  pour Bottom: 67.56,44.45 67.56,57.41 69.85,62.23 86.74,62.23 89.15,57.28 89.15,44.45

## Text on the board
Pads: Resistor | Transistor | LED | Diode | Microcontroller | Wire | AVR | Inductor | Capacitor | Fuse | Header | Keypad | IC | Transformer | LCD | Potentiometer | Regulator | MOSFET | Vacuum Tube | Speaker | Amplifier | PIC | Antenna | Motor | Switch | Filter | Battery
tPlace: tricolor_rev4 | - | - | + | - | B | G | R | + | 1 | 2 | 3 | 4 | 5 | - | + | POT | PB0 | R | G | G | B | 2-03-10 | tricolor_rev4 | - | - | + | - | B | G | R | + | 1 | 2 | tricolor_rev4 | 2-03-10 | 3 | R | 4 | G | 5 | B | B | - | + | POT | PB0 | R | G | G | B | - | G | G | R | 2-03-10 | PB0 | + | tricolor_rev4 | POT | - | - | + | - | B | G | R | - | + | + | - | 1 | 2 | 3 | 4 | 5 | - | + | - | + | 1 | 2 | 3 | 4 | 5 | POT | PB0 | R | G | G | B | 2-03-10
_tNames: BATT | BATT | RED | RED | LUX | LUX | PRG | PRG | R1 | R1 | C1 | C1 | C2 | C2 | C3 | C3 | C4 | C4 | R2 | R2 | GREEN | GREEN | SOIC1 | SOIC1 | R6 | R6 | R3 | R3 | R5 | R5 | R4 | R4 | C5 | C5 | BLUE | BLUE | PERIPH | PERIPH | BATT | BATT | RED | RED | GREEN | GREEN | BLUE | BLUE | RED | RED | LUX | LUX | PRG | PRG | R1 | R1 | C1 | C1 | C2 | C2 | C3 | C3 | C4 | C4 | R2 | R2 | GREEN | GREEN | SOIC1 | SOIC1 | R6 | R6 | R3 | R3 | R5 | R5 | LUX | LUX | C5 | C5 | R1 | R1 | R2 | R2 | R3 | R3 | R4 | R4 | C5 | C5 | BLUE | BLUE | C4 | C4 | SOIC1 | SOIC1 | PERIPH | PERIPH | C3 | C3 | C2 | C2 | C1 | C1 | BATT | BATT | RED | RED | LUX | LUX | R6 | R6 | PRG | PRG | R1 | R1 | C1 | C1 | C2 | C2 | C3 | C3 | C4 | C4 | PERIPH | PERIPH | R2 | R2 | GREEN | GREEN | R5 | R5 | R4 | R4 | SOIC1 | SOIC1 | R6 | R6 | R3 | R3 | R5 | R5 | R4 | R4 | C5 | C5 | BLUE | BLUE | BATT | BATT | PRG | PRG | PERIPH | PERIPH